# Altium PCB PowerBoard_PCB.PcbDoc
Units mm, origin at the board's own origin, x right, y up, seen from the top; angles counter-clockwise.
Board outline 42 x 42 mm, 2 copper layers (Top Layer, Bottom Layer); 24 components, 18 nets, 54 pads, 15 vias.
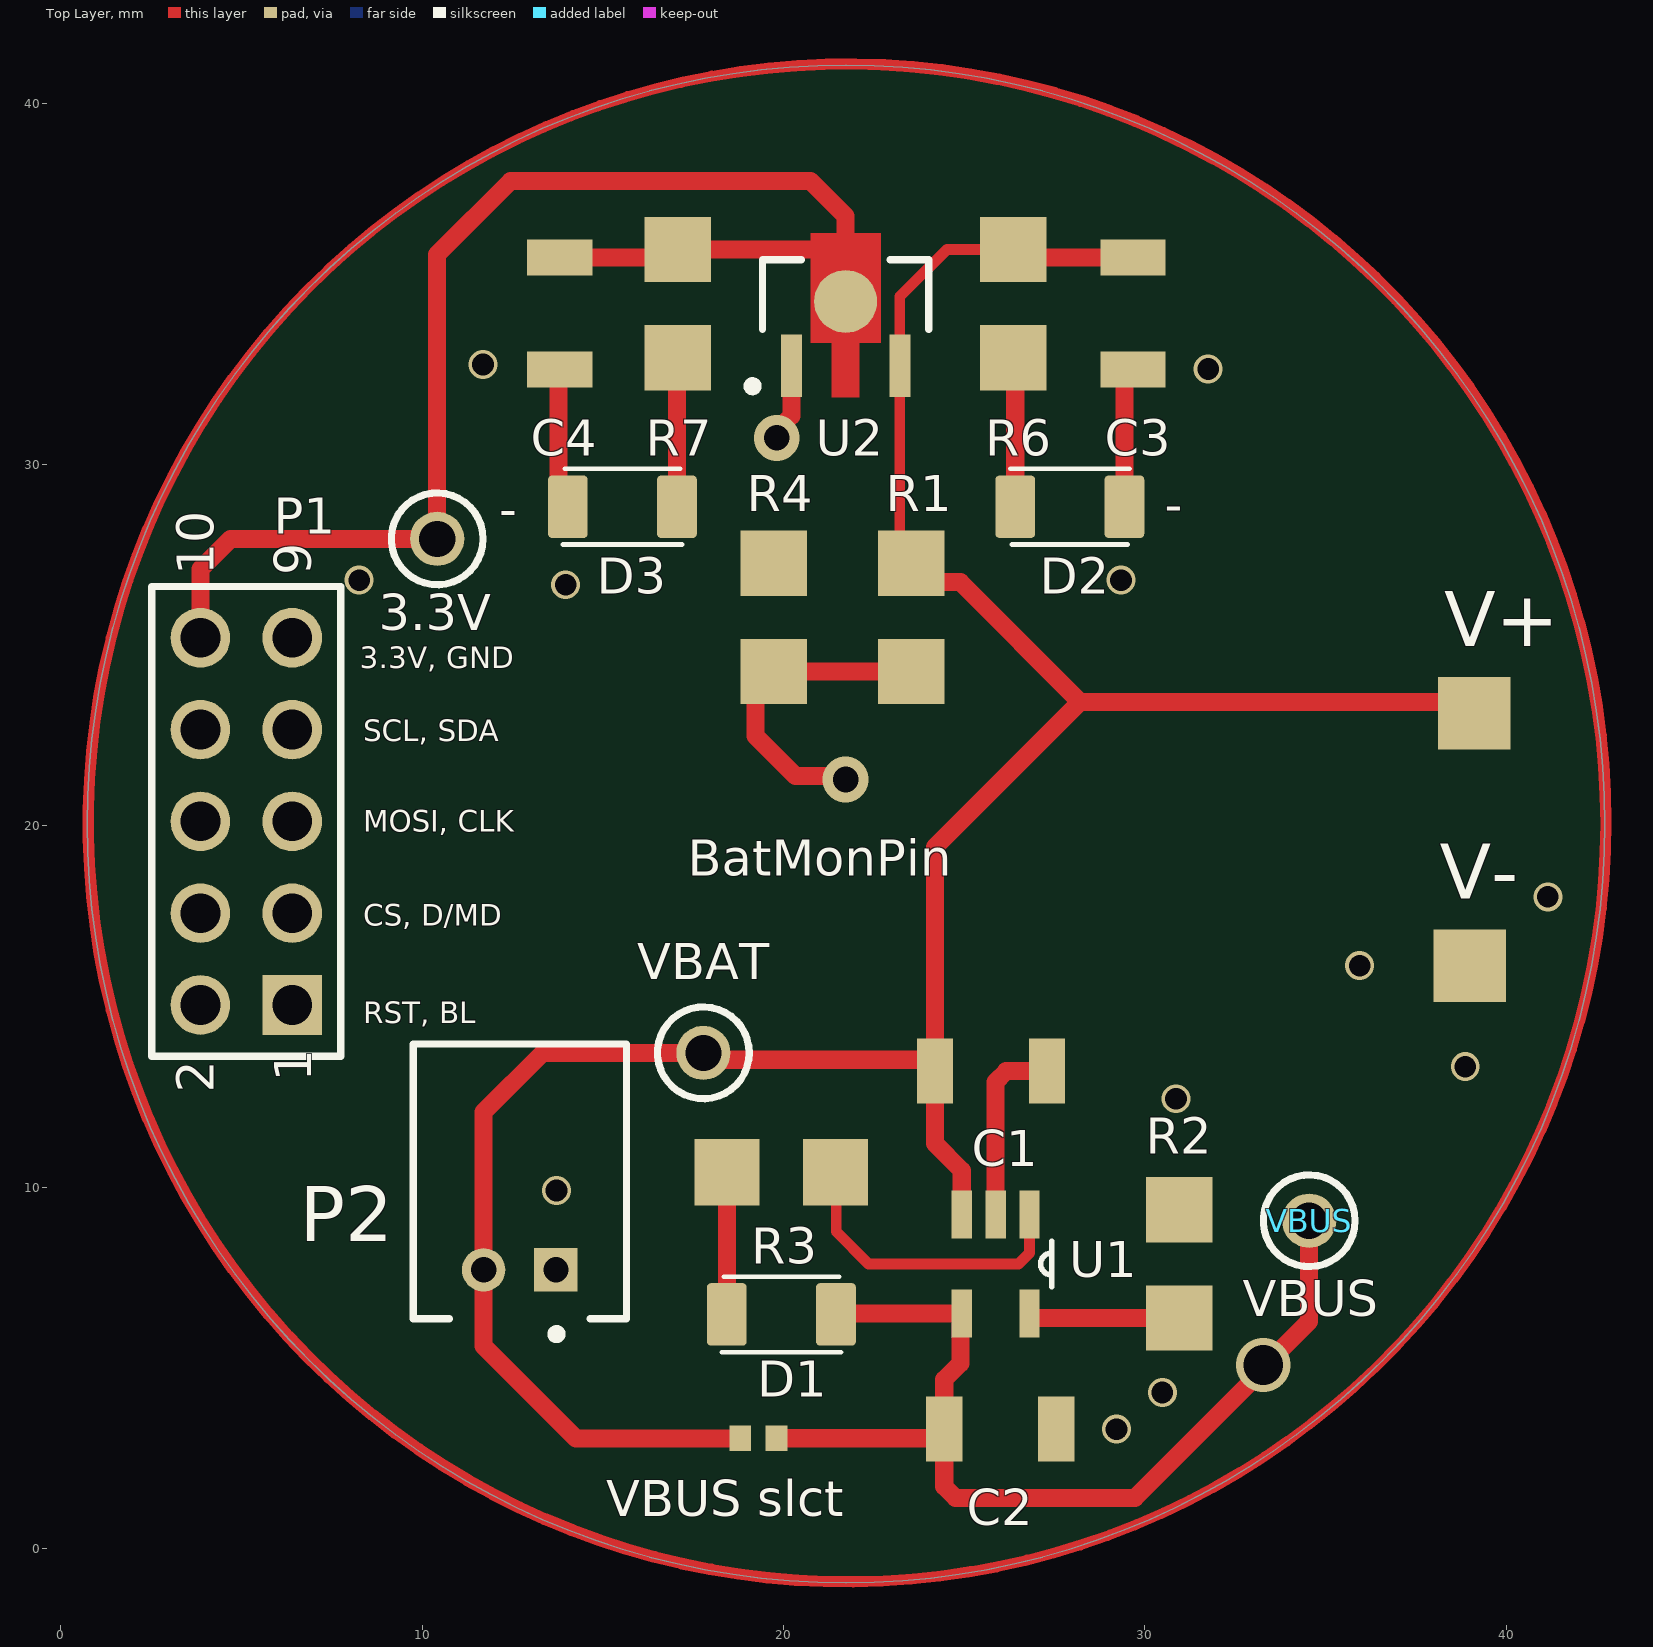
[diagram p0: Top Layer view]
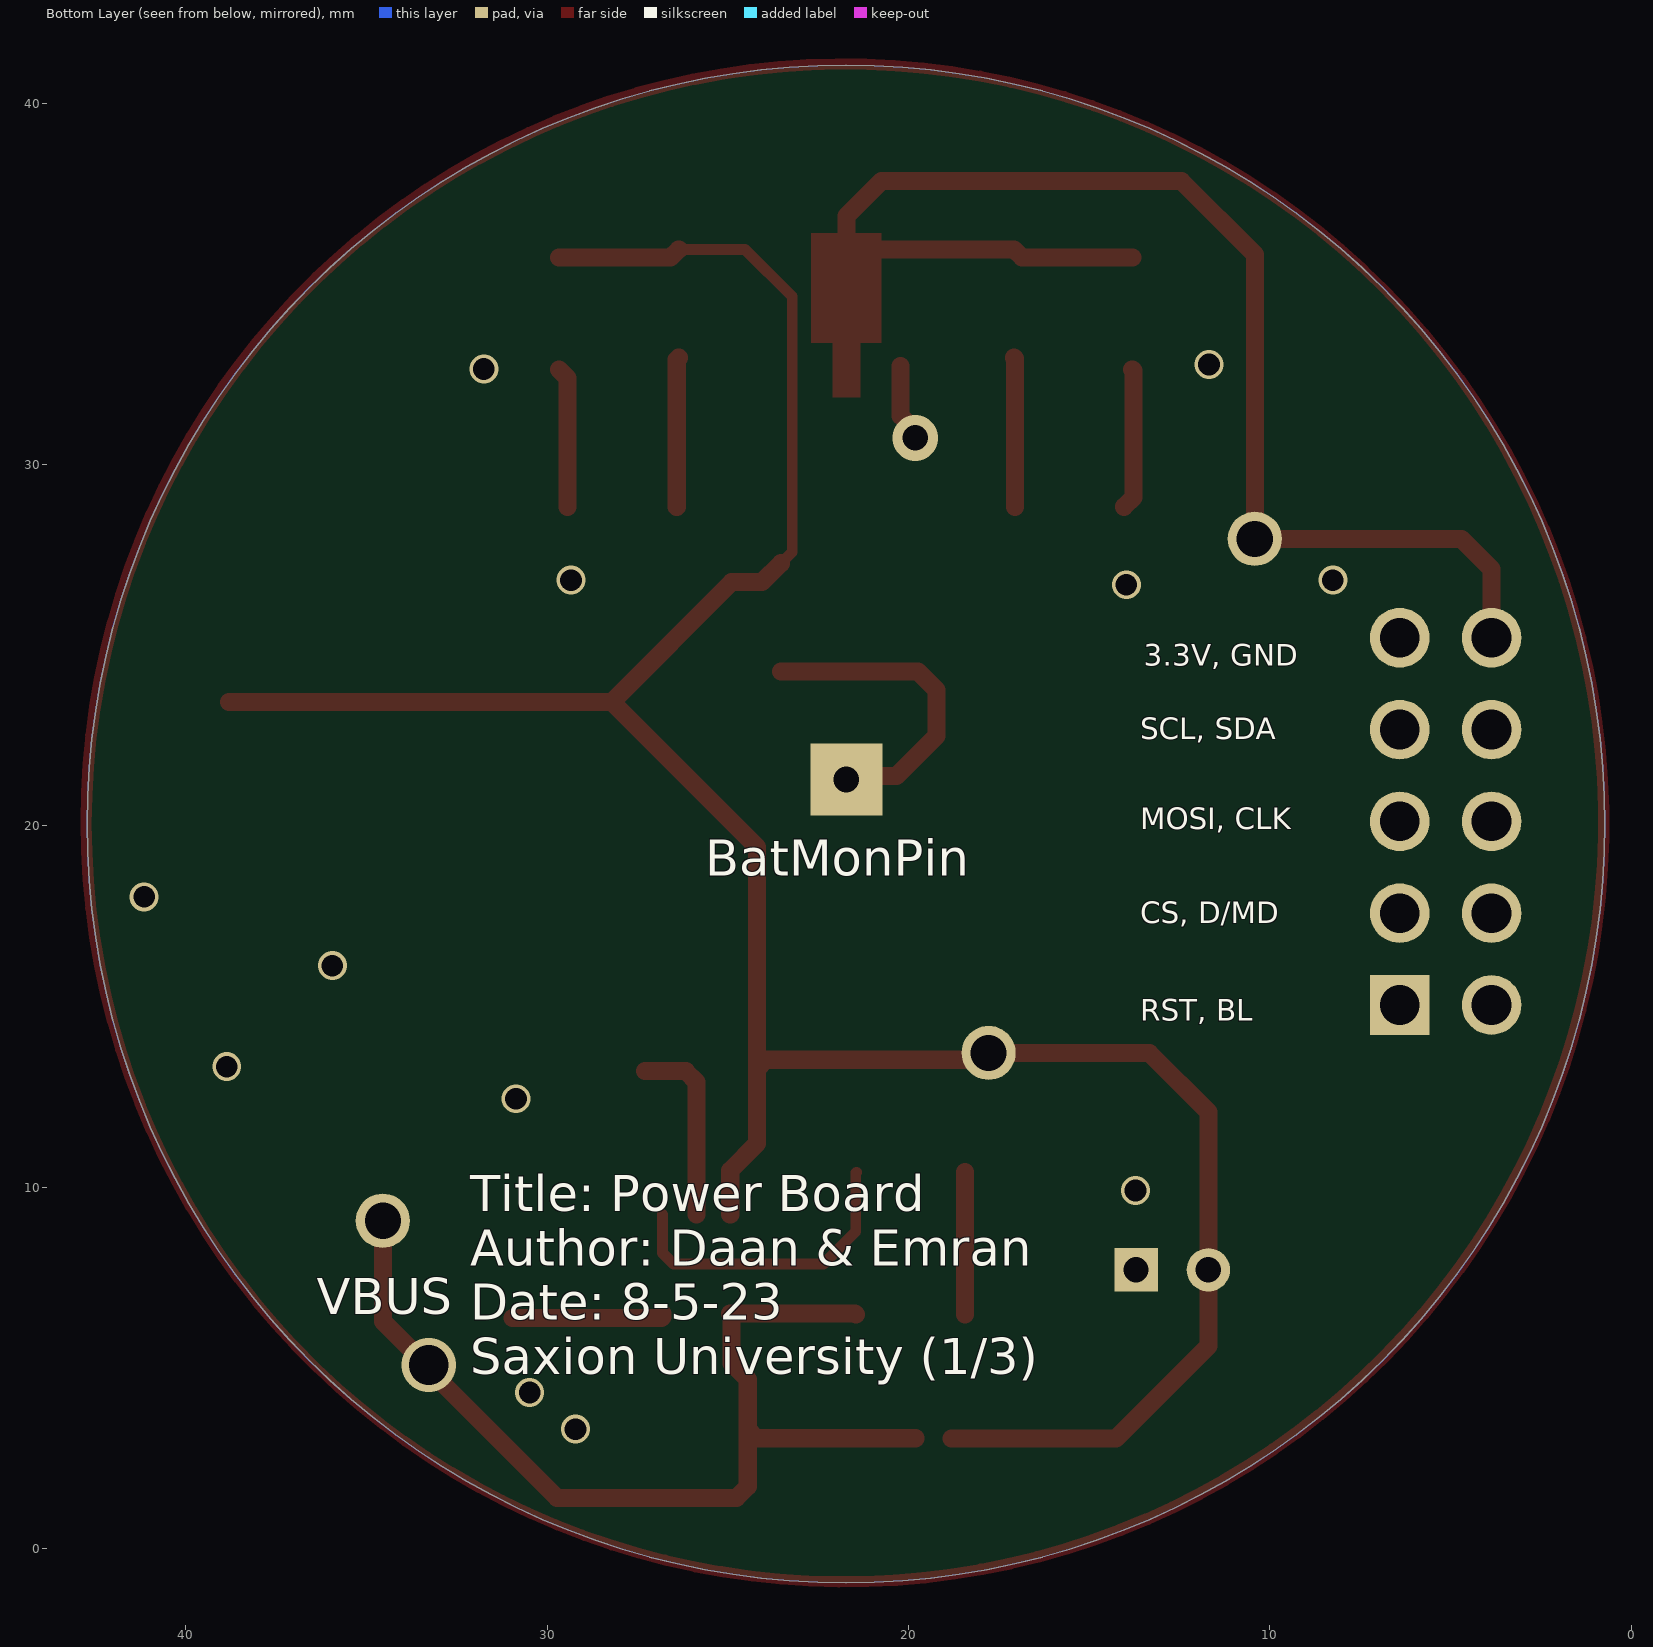
[diagram p1: Bottom Layer view, seen from below]
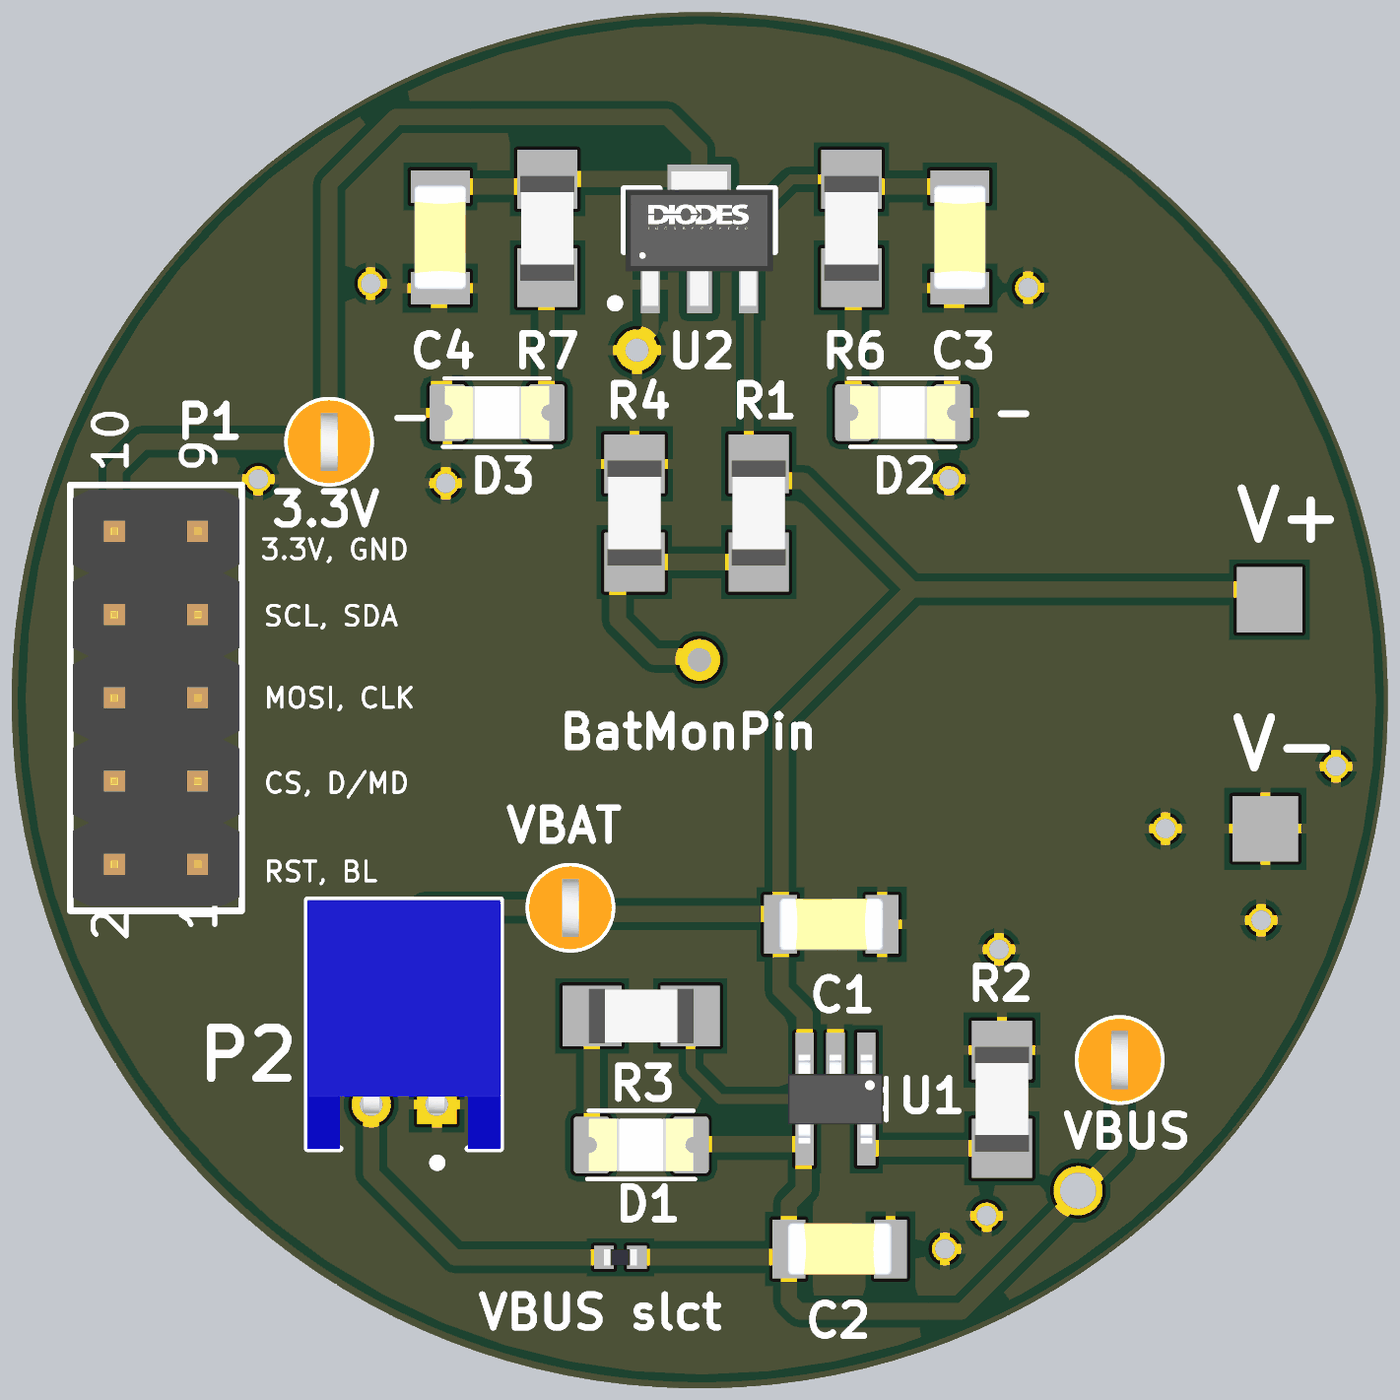
[diagram p2: 3D render of the assembled board from above, using the file's embedded part models]

## Layer stack, top to bottom
Top Solder: solder mask 0.0102, Solder Resist, Dk 3.5
Top Layer: signal copper 0.0356
Dielectric 1: dielectric 0.32, FR-4, Dk 4.8
Bottom Layer: signal copper 0.0356
Bottom Solder: solder mask 0.0102, Solder Resist, Dk 3.5

## Board outline
0.727,20.049 ccw(c21.727,20.049) 21.727,-0.951 ccw(c21.727,20.049) 42.727,20.049 ccw(c21.727,20.049) 21.727,41.049 ccw(c21.727,20.049)

## Design rules (kind name [scope] priority, off if disabled: settings)
Clearance [All] p1: gap=0.23 ignorepadtopadclearanceinfootprint=FALSE
PolygonConnect [All] p1: connectstyle=Relief reliefconductorwidth=0.3 reliefentries=4 polygonreliefangle="90 Angle" airgapwidth=0.254
RoutingVias [All] p1: holewidth=0.711 width=1.27 viastyle="Through Hole" minholewidth=0.711 minwidth=1.27 maxholewidth=0.711 maxwidth=1.27
SolderMaskExpansion [All] p1: expansion=0.102 istentingtop=FALSE
Width [All] p1: maxlimit=0.5 minlimit=0.254 preferedwidth=0.3
30 further rules are at their usual default settings.

## Components (designator, comment, footprint, x,y, rotation, side; value= is the part's Value field where it differs from the comment)
3.3V "5003" KSTN-5003 10.414,27.94 r90 top (schematic designator ?)
BatMonPin "Pad" PAD_SQ_2MM 21.716,21.28 r270 bottom
C1 "4u7" CAP_1206 25.742,13.208 r180 top
C2 "4u7" CAP_1206 25.996,3.302 r180 top
C3 "10u" CAP_1206 29.665,34.176 r90 top
C4 "22u" CAP_1206 13.806,34.176 r90 top
D1 "LED BAT" LED_1206 19.939,6.477 r0 top
D2 "LED VBUS" LED_1206 27.921,28.829 r180 top
D3 "LED 3.3V" LED_1206 15.539,28.829 r0 top
P1 "61301021121" 61301021121 5.132,20.122 r90 top
P2 "Bat" JST-S2B-PH-K-S_V 12.7,10.16 r180 top
R1 "10k" RES_1206 23.527,25.764 r90 top
R2 "5k2" RES_1206 30.949,7.874 r270 top
R3 "470" RES_1206 19.939,10.414 r180 top
R4 "82k" RES_1206 19.732,25.764 r270 top
R6 "10k" RES_1206 26.356,34.451 r90 top
R7 "10k" RES_1206 17.075,34.451 r90 top
U1 "MCP73831T-3ACI/OT" SOT95P270X145-5N 25.869,7.874 r270 top
U2 "AZ1117CR-3.3TRG1" FP-SOT89-MFG 21.716,34.363 r0 top
V+ "Pad" PAD_SQ_2MM 39.116,23.114 r0 top (schematic designator V+?)
V- "Pad" PAD_SQ_2MM 38.989,16.129 r0 top (schematic designator V-?)
VBAT "5003" KSTN-5003 17.78,13.716 r270 top (schematic designator VBAT?)
VBUS "5003" KSTN-5003 34.544,9.07 r270 top (schematic designator VBUS?)
"VBUS slct" "VBUS" RES_0402 19.304,3.048 r0 top

## Footprints (in the part's own frame and the unit in brackets; to place one, negate y for a bottom-side part, rotate by r counter-clockwise, add the part's x,y. Pads: shape width x height; smd on the part's side, far side on the other; paste and mask are expansions set on the pad)
61301021121 [mm] "Pin Header, pitch 2.54 mm, THT, Vertical, dual row, 10p"
  rect 1.65x1.65 hole 1.1: 1(-5.08,-1.27)
  round 1.65 hole 1.1: 2(-5.08,1.27) 3(-2.54,-1.27) 4(-2.54,1.27) 5(0,-1.27) 6(0,1.27) 7(2.54,-1.27) 8(2.54,1.27) 9(5.08,-1.27) 10(5.08,1.27)
  silkscreen extent -6.5,-2.62 6.5,2.62, body extent -6.35,-2.54 6.35,2.54, height 8.59
CAP_1206 [mm]
  rect 1x1.8 smd: 1(-1.55,0) 2(1.55,0)
  body extent -1.6,-0.8 1.6,0.8, height 0.94
FP-SOT89-MFG [mm]
  rect 0.58x1.73 smd paste+0 mask+0: 1(-1.5,-1.635) 3(1.5,-1.635)
  round 1.74 smd paste+0 mask+0: 2(0,0.146)
  Top Layer region: -0.38,-2.5 -0.38,-1 -0.967,-1 -0.967,2.03 0.967,2.03 0.967,-1 0.38,-1 0.38,-2.5
  silkscreen extent -2.7,-2.32 2.3,1.3, body extent -2.4,-2.6 2.4,2.13, height 0.25
JST-S2B-PH-K-S_V [mm] "THD, 2-Leads, Body 7.6x5.9mm, Pitch 2mm"
  rect 1.2x1.2 hole 0.7: 1(-1,2.45)
  round 1.2 hole 0.7: 2(1,2.45)
  silkscreen extent -2.95,-3.8 2.95,4.35, body extent -2.95,-3.8 2.95,3.8, height 4.8
KSTN-5003 [mm] "Test Point, Through Hole, Dia 2.54mm"
  round 1.5 hole 1: 1(0,0)
  silkscreen extent -1.27,-1.27 1.27,1.27, body extent -1.27,-1.27 1.27,1.27, height 4.57
LED_1206 [mm]
  rrect20% 1.1x1.73 smd: A(1.51,0) C(-1.51,0)
  silkscreen extent -1.65,-1.04 1.65,1.04, body extent -1.6,-0.8 1.6,0.8, height 1.1
PAD_SQ_2MM [mm]
  rect 2x2 smd: 1(0,0)
RES_0402 [mm]
  rect 0.6x0.7 smd: 1(-0.5,0) 2(0.5,0)
  body extent -0.5,-0.25 0.5,0.25, height 0.3
RES_1206 [mm]
  rect 1.8x1.84 smd: 1(-1.5,0) 2(1.5,0)
  body extent -1.6,-0.83 1.6,0.83, height 0.57
SOT95P270X145-5N [mil]
  rect 52x22 smd: 1(-54,37) 2(-54,0) 3(-54,-37) 4(54,-37) 5(54,37)
  silkscreen extent -25,49 25,61, body extent -53,-57 53,57, height 57

## Part data
3.3V VBAT VBUS: library part CMP-002-00037-2, "Test Point, Orange, Height 4.6 mm, Tail Length 3 mm, 1-Pin THD, RoHS", Colour=Orange, Manufacturer=Keystone, Package Description="1-Pin Through Hole Device, Dia 2.54 mm", Package Quantity=10, Case/Package=5003, Connector Type=TestPoint, Contact Material=Bronze, Contact Plating=Tin, Datasheet URL=http://keyelco.com/userAssets/file/M65p56.pdf, Datasheet Version=Jun-15, Diameter=2.54mm, Manufacturer URL=http://www.keyelco.com/, Mounting Technology=TH, Package Reference=5003, Packaging=Bulk, Pins=1, RoHS Compliant=True
BatMonPin V+ V-: library part PAD_SQ_2MM, "Test Point Square 2mm"
C1 C2 C3 C4: library part CAP_1206_50V, "Capacitor SMD 1206 50V"
D1 D2 D3: library part "LED - 1206", "Yellow 587nm LED Indication - Discrete 2V 1206 _3216 Metric_", Package="1206 Lite-On", Availability=Unavailable, MF="Lite-On Inc.", MP=LTST-C230KSKT, Price=None, SnapEDA_Link=https://www.snapeda.com/parts/LTST-C230KSKT/Lite-On%20Inc./view-part/264912/?ref=snap
P1: library part CMP-1502-01084-1, "THT Vertical Pin Header WR-PHD, Pitch 2.54 mm, Dual Row, 10 pins", Contact Resistance=20mOhm, Manufacturer="Wurth Elektronik", Operating Temperature=-40to105degC, Rated Current=3A, Withstanding Voltage=500VAC, Working Voltage=250VAC, Datasheet URL=https://katalog.we-online.de/em/datasheet/6130xx21121.pdf, Gender=Male, Manufacturer URL=http://www.we-online.de, Mounting Technology=THT, Orientation=Vertical, Package Reference=61301021121, Packaging=Bag, Part Number=61301021121, Pin Number=10, Pitch=2.54mm, Publisher=WurthElektronik, Row Number=Dual
P2: library part CMP-1755-00004-1, "Male Header, Pitch 2 mm, 1 x 2 Position, Height 4.8 mm, Tail Length 3.4 mm, -25 to 85 degC, RoHS, Bulk", Capacitance="10 uF", Case\Package=Radial, Max Operating Temperature="85 degC", Min Operating Temperature="-40 degC", Package Quantity=200, Tolerance=20%, Voltage Rating="50 V", ComponentLink1Description=Datasheet, ComponentLink1URL=http://www.jst-mfg.com/product/pdf/eng/ePH.pdf, DatasheetVersion=Dec-12, Diameter="5 mm", Height="11 mm", Lead Pitch="2 mm", Length="11 mm", Mount="Through Hole", PackageDescription="Male Header, Pitch 2 mm, 1 x 2 Position, Height 4.8 mm, Tail Length 3.4 mm", PackageReference=S2B-PH-K-S, Packaging=Bulk, Pins=2, Radiation Hardening=No, REACH SVHC="No SVHC", RoHSCompliant=true, Voltage Rating (DC)="50 V"
R1 R2 R3 R4 R6 R7: library part RES_1206, "Resistor SMD 1206"
U1: "Charger IC Lithium Ion/Polymer SOT-23-5", Package="SOT-23-5 Microchip", Arrow_Electronics-Purchase-URL=https://snapeda.com/shop?store=Arrow+Electronics&id=1099789, MF=Microchip, Mouser-Purchase-URL=https://snapeda.com/shop?store=Mouser&id=1099789, MP=MCP73831T-3ACI/OT, SnapEDA_Link=https://www.snapeda.com/parts/MCP73831T-3ACI/OT/Microchip/view-part/1099789/?ref=snap
U2: library part CMP-12756-000007-1, "IC REG LINEAR 3.3V 800MA SOT89", Dropout Voltage=1.2V, Manufacturer="Diodes Inc.", Max Junction Temp=+125°C, Max Supply Voltage=15V, Nominal Supply Current=4mA, Output Current=1.35A, Output Voltage=3.3V, Package=SOT89, Temperature="-20°C to +125°C", Temperature Range Low=-20°C, Accuracy Percentage=1%, Automotive=No, Category=IC, ComponentLink2Description=Datasheet, ComponentLink2URL=https://www.diodes.com/assets/Datasheets/AZ1117C.pdf, Device Class L1="Integrated Circuits (ICs)", Device Class L2="Power Management ICs", Device Class L3="Voltage Regulators - Linear", Digikey Description="IC REG LINEAR 3.3V 800MA SOT89", Footprint Url=https://www.diodes.com/assets/Package-Files/SOT89.pdf, Height=1.6mm, Lead Free=Yes, Manufacturer Part Number=AZ1117CR-3.3TRG1, Mouser Description="DiodesZetex AZ1117CR-3.3TRG1, LDO Regulator, 800mA, 3.3 V, ±1% 3-Pin, SOT-89", Number Of Outputs=1, Octopart=https://octopart.com/az1117cr-3.3trg1-diodes+inc.-30954805, Output Type=Fixed, RoHS=TRUE, Temperature Range High=+125°C
"VBUS slct": library part RES_0402, "Resistor SMD 0402"

## Via types
v1: diameter 0.8, hole 0.6, Top Layer to Bottom Layer, 12 vias
v2: diameter 1.27, hole 0.711, Top Layer to Bottom Layer, 2 vias
v3: diameter 1.5, hole 1.1, Top Layer to Bottom Layer, 1 vias

## Nets (pads, with @x,y where several pads share a name; then routed paths per layer and width w, separated by ;. In a path a pad name is that pad's centre, name@x,y a point inside that pad or via, vN(x,y) a via of type N, cw(c..) or ccw(c..) an arc to the next point about the centre after c; other vN are vias at no path point)
3.3V: 3.3V.1 C4.2 P1.10 R7.2 U2.2 | length 40.9
  Top Layer w0.5: P1.10 3.862,27.103 4.699,27.94 3.3V.1 10.414,35.809 12.451,37.846 20.744,37.846 21.716,36.873 21.716,35.895 21.716,34.746 U2.2 21.479,34.746 21.479,35.895 21.423,35.951 R7.2 16.85,35.726 C4.2
Bat_Prog: R2.2 U1.5 | length 4.3
  Top Layer w0.5: U1.5 26.809,6.403 26.838,6.374 R2.2
"CLK (2)": P1.5
GND: C1.1 C2.1 C3.1 C4.1 D2.C D3.C P1.9 P2.1 R2.1 R4.1 U1.2 U2.1 V-.1 | length 15.2
  Top Layer w0.5: C4.1 13.775,32.595 13.775,29.083 D3.C ; v2(19.812,30.734) 19.812,30.942 20.216,31.347 U2.1 ; U1.2 25.869,12.915 26.162,13.208 C1.1 ; D2.C 29.431,32.392 C3.1
  other v1: 29.21,3.302 30.48,4.318 13.716,9.906 30.861,12.446 38.862,13.335 35.941,16.129 41.148,18.034 13.97,26.67 8.255,26.797 29.337,26.797 31.75,32.639 11.684,32.766
"IO4, BL(6)": P1.1
"IO5, CS(3)": P1.4
"IO16, RST(5)": P1.2
"IO17, D/MD(4)": P1.3
"MOSI (1)": P1.6
NetBatMonPin_1: BatMonPin.1 R1.1 R4.2 | length 8.8
  Top Layer w0.5: v2(21.716,21.28) 21.616,21.38 20.331,21.38 19.224,22.487 19.224,23.756 R4.2 R1.1
NetD1_C: D1.C R3.2 | length 3.9
  Top Layer w0.5: D1.C 18.429,10.404 R3.2
NetD2_A: D2.A R6.1 | length 4.1
  Top Layer w0.5: R6.1 26.411,32.895 D2.A
NetD3_A: D3.A R7.1 | length 4.1
  Top Layer w0.5: D3.A 17.049,32.925 R7.1
NetR3_1: R3.1 U1.1 | length 8.6
  Top Layer w0.3: R3.1 21.456,10.397 21.456,8.77 22.352,7.874 26.504,7.874 26.809,8.179 U1.1
SCL: P1.8
SDA: P1.7
VBAT: "VBUS slct.1" C1.2 C3.2 P2.2 R1.2 R6.2 U1.3 U2.3 V+.1 VBAT.1 | length 75.6
  Top Layer w0.3: R1.2 23.216,27.575 U2.3 23.216,34.646 24.521,35.951 R6.2
  Top Layer w0.5: 18.804,3.048 14.256,3.048 11.7,5.604 P2.2 11.7,12.081 13.335,13.716 VBAT.1 17.971,13.525 23.942,13.525 C1.2@24.192,13.275 ; R1.2 24.046,26.745 24.889,26.745 28.206,23.428 ; U1.3 24.929,10.465 24.192,11.202 C1.2 C1.2@24.192,13.275 ; R6.2 26.581,35.726 C3.2 ; V+.1@38.802,23.428 28.206,23.428 ; C1.2@24.192,13.275 24.192,19.414 28.206,23.428
VBUS: "VBUS slct.2" C2.2 D1.A U1.4 VBUS.1 | length 28.3
  Top Layer w0.5: 19.804,3.048 19.808,3.052 24.196,3.052 C2.2 ; D1.A 21.474,6.502 U1.4 24.9,6.473 24.9,5.127 24.446,4.673 C2.2 ; VBUS.1 34.544,6.285 33.339,5.08 v3(33.274,5.08) 33.274,4.953 29.718,1.397 24.765,1.397 24.446,1.716 C2.2
copper on no net: | length 263.9
  Top Layer w0.254: 42.727,20.049 ccw(c21.727,20.049) 42.727,20.049 ; 42.789,20.109 ccw(c21.789,20.109) 42.789,20.109

## Polygon pours and split planes (outlines as drawn)
GND on Top Layer "NONET_L01_P000" (solid, shelved, pour order 0): 0.727,20.049 ccw(c21.727,20.049) 21.727,-0.951 ccw(c21.727,20.049) 42.727,20.049 ccw(c21.727,20.049) 21.727,41.049 ccw(c21.727,20.049)
GND on Bottom Layer "NONET_L02_P001" (solid, shelved, pour order 1): 0.727,20.049 ccw(c21.727,20.049) 21.727,-0.951 ccw(c21.727,20.049) 42.727,20.049 ccw(c21.727,20.049) 21.727,41.049 ccw(c21.727,20.049)

## Silkscreen, mask and mechanical layers (free items; w line width, h text height)
Top Overlay:
  text "-" at 30.553,28.402 h1
  text "-" at 12.138,28.275 h1
  text "3.3V, GND" at 8.265,24.366 h0.6
  text "SCL, SDA" at 8.362,22.337 h0.6
  text "MOSI, CLK" at 8.362,19.837 h0.6
  text "BatMonPin" at 17.345,18.615 h1
  text "CS, D/MD" at 8.362,17.237 h0.6
  text "RST, BL" at 8.362,14.537 h0.6
  text "VBUS" at 32.712,6.423 h1
Bottom Overlay:
  text "3.3V, GND" at 13.489,24.43 h0.6
  text "SCL, SDA" at 13.586,22.401 h0.6
  text "MOSI, CLK" at 13.586,19.901 h0.6
  text "CS, D/MD" at 13.586,17.301 h0.6
  text "RST, BL" at 13.586,14.601 h0.6
  text "Title: Power Board / Author: Daan & Emran / Date: 8-5-23 / Saxion University (1/3)" at 32.131,4.826 h1

## Text inside footprints (layer, text, board x,y; h text height)
P1: Top Overlay "10" at 4.232,26.932 h1.02 r90; Top Overlay "9" at 6.932,26.932 h1.02 r90; Top Overlay "1" at 6.932,12.912 h1.02 r90; Top Overlay "2" at 4.232,12.612 h1.02 r90